# Altium PCB RF-UNIT.PcbDoc (part 2 of 4)
Units mm, origin at the board's own origin, x right, y up, seen from the top; angles counter-clockwise.
Board outline 187 x 77 mm, 2 copper layers (Top Layer, Top, Bottom Layer, Bottom); 244 components, 167 nets, 747 pads, 3684 vias.
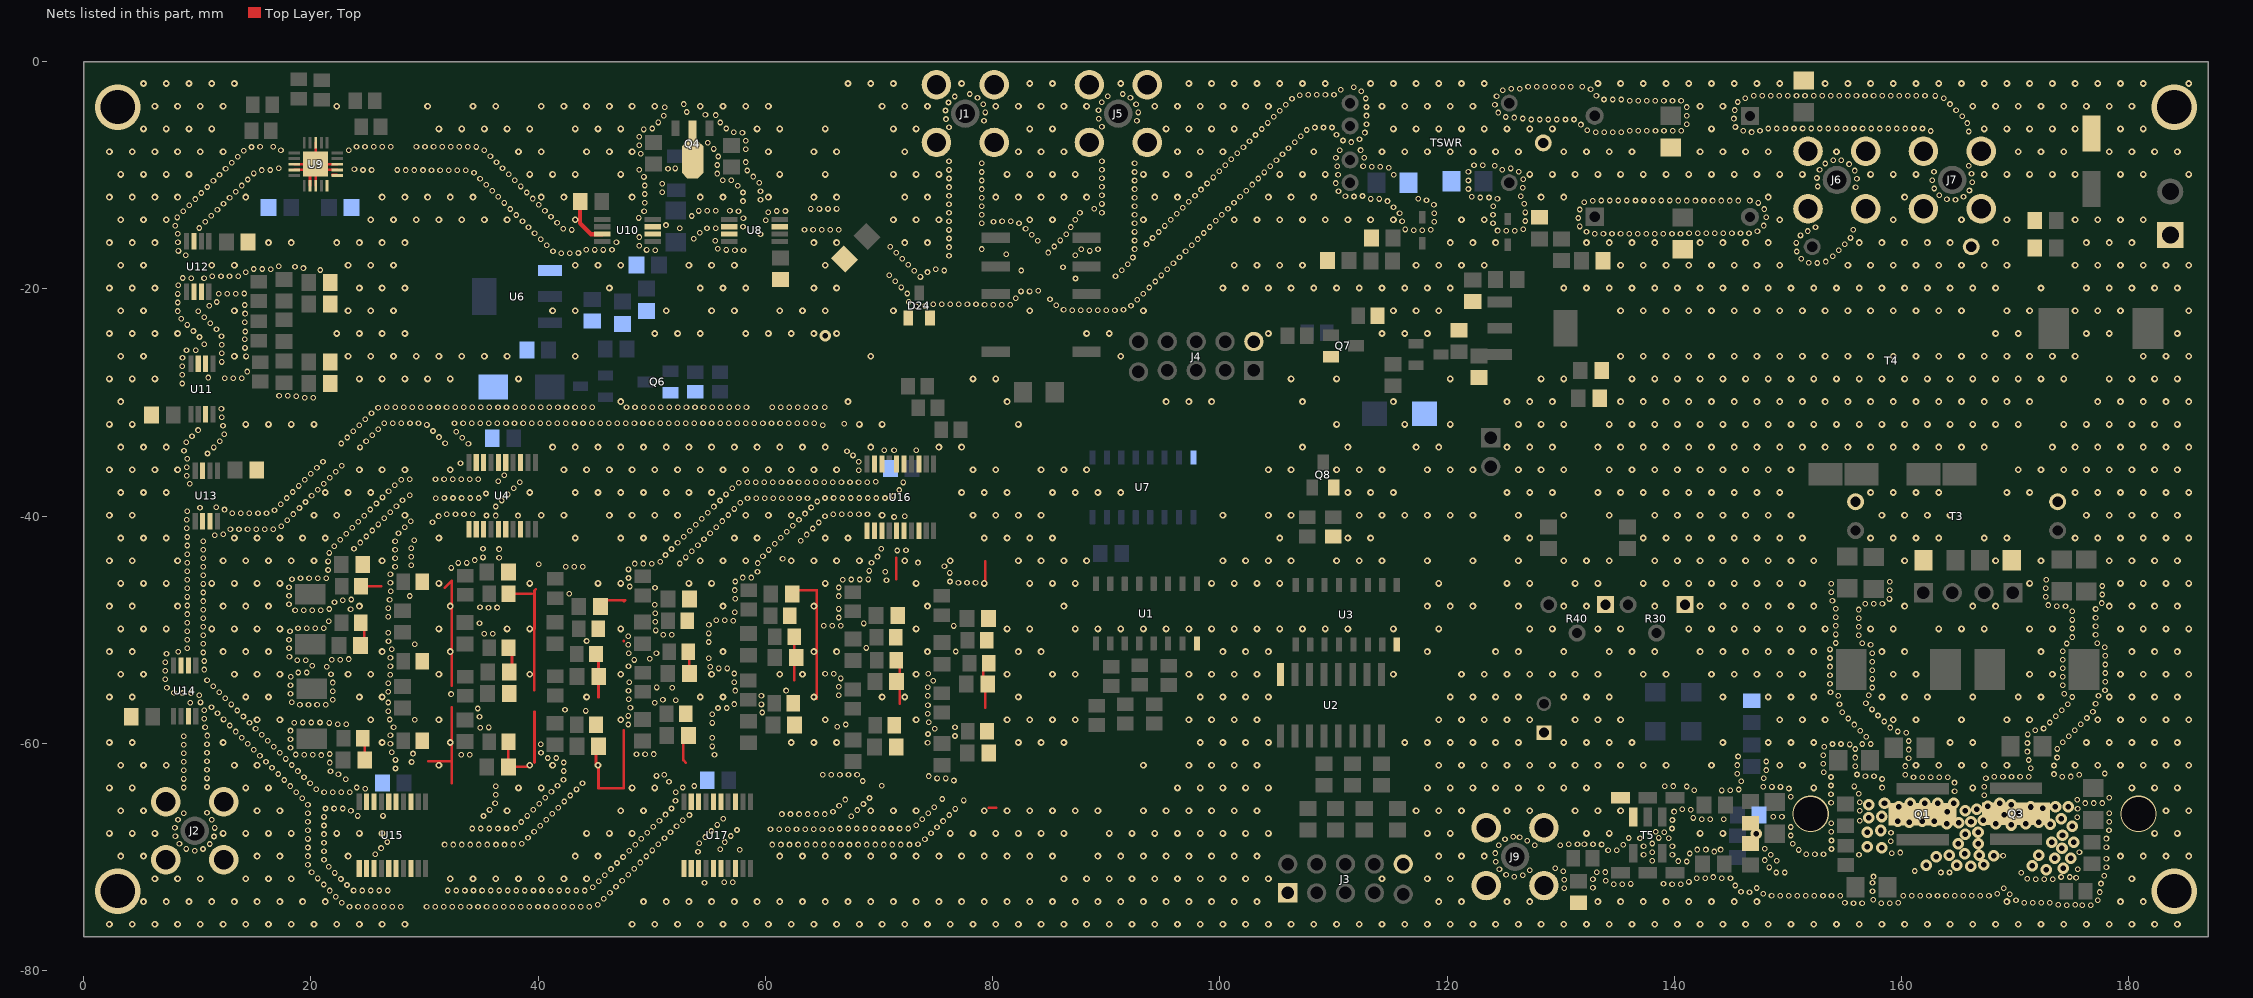
[diagram p2: the nets of this part, all layers, seen from the top]

## Via types
v1: diameter 0.5, hole 0.3, Top Layer, Top to Bottom Layer, Bottom, tented both sides, 1961 vias
v2: diameter 0.6, hole 0.3, Top Layer, Top to Bottom Layer, Bottom, tented both sides, 1584 vias
v3: diameter 1.016, hole 0.486, Top Layer, Top to Bottom Layer, Bottom, tented both sides, 127 vias
v4: diameter 0.8, hole 0.486, Top Layer, Top to Bottom Layer, Bottom, tented both sides, 6 vias
v5: diameter 4, hole 3, Top Layer, Top to Bottom Layer, Bottom, 4 vias
v6: diameter 3.2, hole 3, Top Layer, Top to Bottom Layer, Bottom, 2 vias

## Nets (pads, with @x,y where several pads share a name; then routed paths per layer and width w, separated by ;. In a path a pad name is that pad's centre, name@x,y a point inside that pad or via, vN(x,y) a via of type N, cw(c..) or ccw(c..) an arc to the next point about the centre after c; other vN are vias at no path point) (continued)
GND: C1.1 C2.1 C3.1 C4.1 C7.1 C13.1 C14.1 C15.1 C22.1 C23.1 C24.1 C34.1 C35.1 C36.1 C46.1 C47.1 C48.1 C55.1 C60.1 C61.1 C62.1 C74.1 C75.1 C76.1 C88.1 C89.1 C90.1 C95.2 C104.1 C105.2 C107.1 C108.1 C110.1 C113.2 C114.2 C115.1 C116.2 C117.1 C118.1 C119.2 C121.1 C122.1 C123.1 C124.1 C125.1 C126.1 C127.1 C128.2 C129.2 C130.1 C131.1 C132.1 C133.1 C134.1 C135.1 C136.1 C137.2 C139.1 C140.1 C141.1 C142.1 D2.2 D24.1 D24.2 J1.1 J1.2 J1.3 J1.4 J2.1 J2.2 J2.3 J2.4 J3.1 J3.10 J4.2 J5.1 J5.2 J5.3 J5.4 J6.1 J6.2 J6.3 J6.4 J7.1 J7.2 J7.3 J7.4 J8.1 J9.1 J9.2 J9.3 J9.4 L1.1 L2.1 L3.1 L4.1 L5.1 L6.1 L9.1 L10.1 L11.1 L14.1 L15.1 L16.1 L19.1 L20.1 L21.1 L24.1 L25.1 L26.1 L29.1 L30.1 L31.1 L34.1 L35.1 L36.1 Q1.2 Q3.2 Q4.0 Q4.2 Q6.2 Q7.2 Q8.2 R1.1 R14.1 R30.1 R33.1 R36.2 R40.1 R42.1 R43.2 R45.1 R53.2 R54.1 R55.2 R56.2 R70.1 T3.2 T3.3 T4.6 T5.3 T5.9 TSWR.7 U1.8 U2.8 U3.8 U4.3 U4.5 U4.6 U4.8 U4.9 U4.11 U4.12 U4.13 U4.15 U4.16 U4.18 U6.1 U7.8 U8.3 U8.6 U8.7 U9.3 U9.4 U9.7 U9.8 U9.10 U9.11 U9.12 U9.13 U9.18 U9.21 U10.3 U10.6 U10.7 U11.3 U11.6 U11.7 U12.3 U12.6 U12.7 U13.3 U13.6 U13.7 U14.3 U14.6 U14.7 U15.3 U15.5 U15.6 U15.8 U15.9 U15.11 U15.12 U15.13 U15.15 U15.16 U15.18 U16.3 U16.5 U16.6 U16.8 U16.9 U16.11 U16.12 U16.13 U16.15 U16.16 U16.18 U17.3 U17.5 U17.6 U17.8 U17.9 U17.11 U17.12 U17.13 U17.15 U17.16 U17.18 | length 113.6
  Top Layer, Top w0.23: U9.4@18.522,-9.529 19.922,-9.529 U9.7@19.922,-10.929 ; U9.3@18.522,-9.029 U9.21@20.422,-9.029 ; U9.8@20.422,-10.929 U9.21@20.422,-9.029 ; U9.18@20.422,-7.129 U9.21@20.422,-9.029 ; U9.21@20.922,-9.529 U9.12@22.322,-9.529 ; U9.11@21.902,-9.964 U9.11@22.257,-9.964 ; U9.13@22.322,-9.029 U9.21@20.422,-9.029 ; L35.1@24.397,-49.398 24.709,-49.711 C89.1@24.709,-51.303 ; L34.1@24.416,-46.173 26.208,-46.173 ; L36.1@24.575,-59.558 24.733,-59.717 C90.1@24.733,-61.463 ; 30.321,-61.59 32.39,-61.59 ; 31.796,-46.3 32.385,-45.71 32.385,-47.615 32.39,-47.62 32.39,-54.918 32.385,-54.923 ; 32.385,-56.823 32.39,-56.828 32.39,-61.59 ; 32.39,-63.495 32.39,-61.59 ; L6.1@37.387,-59.838 C15.1@37.387,-62.06 v2@39.297,-62.06 ; L5.1@37.387,-51.583 37.699,-51.895 C14.1@37.699,-53.488 ; L4.1@37.387,-46.82 37.392,-46.815 39.419,-46.815 ; 39.673,-57.229 39.678,-57.234 39.678,-61.679 ; 39.673,-55.329 39.673,-49.937 39.678,-49.932 39.678,-46.556 39.8,-46.434 ; C24.1@45.089,-60.125 45.089,-61.805 45.314,-62.03 45.314,-63.935 47.541,-63.935 47.541,-58.855 47.536,-58.85 ; L10.1@45.089,-52.136 45.309,-52.356 45.309,-55.946 ; C22.1@45.426,-47.311 45.509,-47.394 47.652,-47.394 47.541,-47.504 ; 47.536,-50.989 47.541,-50.984 ; C36.1@52.777,-59.802 52.777,-61.481 53.002,-61.707 ; C34.1@53.135,-46.784 C34.1@53.14,-46.779 ; L15.1@53.227,-51.945 53.315,-52.033 C35.1@53.315,-53.85 ; C46.1@62.081,-46.525 62.085,-46.52 64.528,-46.52 64.533,-46.525 64.533,-50.018 64.528,-50.023 v2@64.528,-56.05 ; 62.526,-54.422 62.526,-50.617 L20.1@62.531,-50.612 ; L25.1@71.516,-52.705 71.828,-53.017 71.828,-56.515 ; 71.516,-45.561 71.516,-43.656 ; L30.1@79.191,-53.032 79.191,-54.783 79.345,-54.937 79.345,-56.842 ; v2@79.35,-45.888 79.35,-43.983 ; 79.661,-65.659 80.335,-65.659
  Top Layer, Top w0.381: U9.21@19.922,-9.529 U9.21@20.422,-9.029 U9.21@20.922,-9.529 ; C135.1@43.7,-12.319 43.688,-12.331 43.688,-14.224 44.648,-15.184 U10.3@45.654,-15.184
  other v1: 23.397,-74.368 24.151,-74.368 24.905,-74.368 25.659,-74.368 26.413,-74.368 27.167,-74.368 27.921,-74.368 30.183,-74.368 30.937,-74.368 31.691,-74.368 32.445,-74.368 33.199,-74.368 33.953,-74.368 34.707,-74.368 35.461,-74.368 36.215,-74.368 36.969,-74.368 37.723,-74.368 38.477,-74.368 39.231,-74.368 39.985,-74.368 40.739,-74.368 41.493,-74.368 42.247,-74.368 43.001,-74.368 43.755,-74.368 44.509,-74.368 174.535,-74.235 175.892,-74.235 176.646,-74.235 45.247,-74.215 173.781,-74.215 175.288,-74.19 155.769,-74.058 156.523,-74.058 158.202,-74.058 158.956,-74.058 22.728,-74.021 155.015,-74.03 159.709,-74.027 170.791,-74.02 171.545,-74.02 172.299,-74.02 173.053,-74.02 177.276,-73.821 170.069,-73.803 157.502,-73.776 45.788,-73.688 22.195,-73.488 148.557,-73.409 149.311,-73.409 150.065,-73.409 150.819,-73.409 151.573,-73.409 152.327,-73.409 153.081,-73.409 153.835,-73.409 154.589,-73.409 160.147,-73.413 160.901,-73.412 161.655,-73.412 162.409,-73.412 163.163,-73.411 163.917,-73.411 164.671,-73.41 165.425,-73.41 166.179,-73.41 166.933,-73.409 167.687,-73.409 169.525,-73.281 147.822,-73.239 168.422,-73.242 46.321,-73.155 146.616,-73.113 177.446,-73.086 145.864,-73.06 157.439,-73.025 21.661,-72.955 23.756,-72.952 24.51,-72.952 25.264,-72.952 26.018,-72.952 26.772,-72.952 32.05,-72.952 32.804,-72.952 33.558,-72.952 34.312,-72.952 35.066,-72.952 35.82,-72.952 36.574,-72.952 37.328,-72.952 38.082,-72.952 38.836,-72.952 39.59,-72.952 40.344,-72.952 41.098,-72.952 41.852,-72.952 42.606,-72.952 43.36,-72.952 44.114,-72.952 130.308,-72.76 168.992,-72.748 147.266,-72.73 132.836,-72.711 44.81,-72.663 46.854,-72.622 145.352,-72.507 23.178,-72.468 21.128,-72.422 134.666,-72.386 135.42,-72.386 136.174,-72.37 139.801,-72.386 140.555,-72.386 139.048,-72.347 177.554,-72.34 157.439,-72.271 54.644,-72.261 56.376,-72.236 57.13,-72.226 141.284,-72.194 45.344,-72.13 47.387,-72.089 133.977,-72.081 130.308,-72.006 171.806,-71.973 172.56,-71.973 173.314,-71.973 22.644,-71.935 132.836,-71.957 171.054,-71.915 20.595,-71.889 141.969,-71.88 142.723,-71.876 144.185,-71.876 144.939,-71.876 175.355,-71.816 143.439,-71.769 174.037,-71.758 174.791,-71.758 125.921,-71.747 157.53,-71.724 177.835,-71.641 126.662,-71.605 45.877,-71.596 47.92,-71.556 125.191,-71.558 22.111,-71.402 170.521,-71.382 20.062,-71.355 148.962,-71.361 149.716,-71.361 163.463,-71.364 164.217,-71.363 133.175,-71.343 133.929,-71.329 130.234,-71.256 161.158,-71.235 127.284,-71.18 124.608,-71.081 175.501,-71.077 46.41,-71.063 48.453,-71.023 129.525,-71.001 148.351,-70.919 178.029,-70.912 21.578,-70.869 19.739,-70.674 46.943,-70.53 48.986,-70.489 124.269,-70.407 141.092,-70.399 140.339,-70.358 149.025,-70.336 138.044,-70.323 147.963,-70.272 21.155,-70.245 178.029,-70.158 47.476,-69.997 49.52,-69.956 19.739,-69.92 168.932,-69.885 148.494,-69.801 156.254,-69.816 137.292,-69.8 139.832,-69.8 25.657,-69.757 151.621,-69.748 152.375,-69.748 153.129,-69.748 141.356,-69.693 159.138,-69.676 124.248,-69.653 159.889,-69.609 175.653,-69.584 138.044,-69.569 54.07,-69.536 143.515,-69.521 21.155,-69.491 9.766,-69.458 48.009,-69.464 50.053,-69.423 134.167,-69.396 134.921,-69.396 150.963,-69.379 57.753,-69.36 142.027,-69.348 142.781,-69.348 144.068,-69.348 56.03,-69.328 10.504,-69.3 153.828,-69.3 9.031,-69.29 147.967,-69.262 26.179,-69.213 19.739,-69.166 178.029,-69.131 137.292,-69.046 139.832,-69.046 124.542,-68.959 127.71,-68.953 129.972,-68.953 48.542,-68.931 135.504,-68.918 31.766,-68.907 32.52,-68.907 33.274,-68.907 34.028,-68.907 34.782,-68.907 35.536,-68.907 36.29,-68.907 37.044,-68.907 37.798,-68.907 50.586,-68.89 60.618,-68.907 61.372,-68.907 62.126,-68.907 62.88,-68.907 63.634,-68.907 64.388,-68.907 65.142,-68.907 65.896,-68.907 66.65,-68.907 67.404,-68.907 68.158,-68.907 68.912,-68.907 69.666,-68.907 70.42,-68.907 71.174,-68.907 71.928,-68.907 72.682,-68.907 132.089,-68.888 133.596,-68.903 73.435,-68.886 130.721,-68.865 131.475,-68.865 132.843,-68.865 11.111,-68.853 150.43,-68.845 8.432,-68.833 38.547,-68.822 138.049,-68.815 54.187,-68.791 21.155,-68.737 56.424,-68.685 26.712,-68.68 159.038,-68.607 127.057,-68.577 153.828,-68.546 74.042,-68.438 125.097,-68.45 19.739,-68.412 49.076,-68.397 51.119,-68.357 136.975,-68.362 139.515,-68.362 178.029,-68.377 135.977,-68.331 39.109,-68.319 138.62,-68.323 54.706,-68.245 126.377,-68.25 125.816,-68.22 11.476,-68.193 8.077,-68.168 56.958,-68.152 150.258,-68.111 21.155,-67.983 74.575,-67.905 49.609,-67.864 159.065,-67.853 51.652,-67.824 139.115,-67.821 39.642,-67.786 138.362,-67.782 153.803,-67.792 55.239,-67.712 19.739,-67.658 178.257,-67.658 57.499,-67.628 60.452,-67.564 61.214,-67.564 61.976,-67.564 62.738,-67.564 63.5,-67.564 64.262,-67.564 65.024,-67.564 65.786,-67.564 34.201,-67.491 34.955,-67.491 35.709,-67.491 36.463,-67.491 37.217,-67.491 66.535,-67.491 67.289,-67.491 68.043,-67.491 68.797,-67.491 69.551,-67.491 70.305,-67.491 71.059,-67.491 71.813,-67.491 72.567,-67.491 139.795,-67.494 11.525,-67.441 37.97,-67.454 8.036,-67.415 75.108,-67.372 150.258,-67.357 50.142,-67.331 52.185,-67.291 40.175,-67.253 21.155,-67.229 73.267,-67.21 55.772,-67.178 153.803,-67.038 38.504,-66.921 19.739,-66.904 178.28,-66.905 75.641,-66.838 50.675,-66.798 156.331,-66.803 52.719,-66.757 11.267,-66.732 139.832,-66.741 8.308,-66.711 40.708,-66.719 73.8,-66.677 142.416,-66.669 143.17,-66.669 144.355,-66.669 56.305,-66.645 141.669,-66.564 175.452,-66.514 21.155,-66.475 148.714,-66.462 149.468,-66.462 67.566,-66.404 24.118,-66.385 26.349,-66.385 35.194,-66.391 39.037,-66.388 53.318,-66.3 76.174,-66.305 51.208,-66.265 61.459,-66.221 62.213,-66.221 62.967,-66.221 63.721,-66.221 64.475,-66.221 65.229,-66.221 41.241,-66.186 8.807,-66.146 19.739,-66.15 74.333,-66.144 178.28,-66.151 10.854,-66.101 65.954,-66.014 139.975,-66.001 23.524,-65.921 156.331,-65.928 68.099,-65.871 35.727,-65.858 39.57,-65.855 141.45,-65.843 76.707,-65.772 140.698,-65.786 175.488,-65.761 21.286,-65.732 22.04,-65.732 22.794,-65.732 51.741,-65.732 41.774,-65.653 74.866,-65.611 66.487,-65.48 19.739,-65.396 68.632,-65.338 40.103,-65.322 36.21,-65.279 176.166,-65.255 176.92,-65.255 177.674,-65.255 153.795,-65.219 156.331,-65.174 42.307,-65.12 52.089,-65.063 77.47,-65.024 175.468,-64.969 67.02,-64.947 75.565,-64.897 19.247,-64.825 69.166,-64.805 40.636,-64.788 178.27,-64.794 150.258,-64.703 42.841,-64.587 167.286,-64.572 36.268,-64.527 153.789,-64.465 156.243,-64.425 21.162,-64.316 21.916,-64.316 22.67,-64.316 23.424,-64.316 18.713,-64.292 52.107,-64.309 41.169,-64.255 164.665,-64.204 141.763,-64.137 144.16,-64.141 144.914,-64.138 145.664,-64.064 20.461,-64.037 43.374,-64.054 24.786,-63.996 150.084,-63.969 8.807,-63.884 158.282,-63.891 24.041,-63.883 52.729,-63.883 10.854,-63.839 148.588,-63.834 149.342,-63.834 147.834,-63.831 167.262,-63.818 141.09,-63.797 155.837,-63.79 18.18,-63.759 36.268,-63.773 139.162,-63.774 139.915,-63.758 53.735,-63.753 70.23,-63.737 41.703,-63.722 153.789,-63.711 19.928,-63.504 43.907,-63.52 164.657,-63.45 51.521,-63.373 145.877,-63.341 68.582,-63.312 76.597,-63.269 17.647,-63.226 42.236,-63.189 8.807,-63.13 23.055,-63.144 158.282,-63.137 10.854,-63.085 75.111,-63.086 75.865,-63.086 147.882,-63.079 167.425,-63.082 19.395,-62.971 161.052,-62.969 161.806,-62.969 162.56,-62.979 163.314,-62.979 164.068,-62.979 153.789,-62.957 168.165,-62.939 168.919,-62.939 169.673,-62.939 170.427,-62.929 171.181,-62.929 174.135,-62.925 174.889,-62.923 74.387,-62.876 156.819,-62.882 157.573,-62.882 50.419,-62.865 51.092,-62.754 65.054,-62.759 65.808,-62.759 66.562,-62.757 67.316,-62.759 68.07,-62.759 156.078,-62.74 160.33,-62.752 175.626,-62.763 22.426,-62.727 17.114,-62.692 173.416,-62.7 145.548,-62.662 177.876,-62.649 153.152,-62.554 18.862,-62.437 21.729,-62.441 42.25,-62.435 8.807,-62.376 148.076,-62.35 10.854,-62.331 27.445,-62.213 171.368,-62.199 16.581,-62.159 155.915,-62.004 160.33,-61.998 173.416,-61.946 18.329,-61.904 145.548,-61.908 153.115,-61.801 21.669,-61.689 42.25,-61.681 8.807,-61.622 16.048,-61.626 28.861,-61.642 10.854,-61.577 148.076,-61.596 27.445,-61.459 171.199,-61.464 17.796,-61.371 160.614,-61.3 40.852,-61.289 41.606,-61.289 155.915,-61.25 173.687,-61.242 145.61,-61.157 15.515,-61.093 153.115,-61.047 20.922,-61.032 19.415,-60.991 20.169,-60.991 33.234,-61.001 33.988,-61.001 55.526,-60.998 18.661,-60.98 48.657,-60.965 49.411,-60.965 50.164,-60.94 21.669,-60.935 28.99,-60.899 8.807,-60.868 17.262,-60.838 10.854,-60.823 40.251,-60.833 27.114,-60.781 171.078,-60.72 14.981,-60.56 160.62,-60.546 155.929,-60.496 173.706,-60.489 18.202,-60.381 16.729,-60.305 153.203,-60.298 55.327,-60.271 8.807,-60.114 40.24,-60.079 155.426,-60.093 10.854,-60.069 153.916,-60.054 154.67,-60.054 156.54,-60.054 157.294,-60.054 14.448,-60.027 27.002,-60.036 171.078,-59.966 74.276,-59.932 174.182,-59.904 16.196,-59.772 160.62,-59.792 18.202,-59.627 55.327,-59.517 13.915,-59.493 156.899,-59.412 174.715,-59.371 8.807,-59.36 76.688,-59.349 10.872,-59.315 27.002,-59.282 15.663,-59.238 171.105,-59.212 74.314,-59.179 160.41,-59.068 13.382,-58.96 159.664,-58.957 18.202,-58.873 156.366,-58.879 171.755,-58.832 175.248,-58.837 15.13,-58.705 74.902,-58.706 172.497,-58.693 34.911,-58.634 158.994,-58.611 10.685,-58.585 27.277,-58.58 35.664,-58.599 76.688,-58.595 66.339,-58.531 12.849,-58.427 155.833,-58.346 47.928,-58.341 67.068,-58.337 22.357,-58.32 23.111,-58.32 175.781,-58.304 18.538,-58.198 21.613,-58.202 55.327,-58.202 14.597,-58.172 19.291,-58.163 20.045,-58.163 20.799,-58.163 74.388,-58.155 173.03,-58.16 158.461,-58.078 29.141,-57.935 12.316,-57.894 26.952,-57.899 10.604,-57.835 155.3,-57.812 176.314,-57.771 34.841,-57.669 14.063,-57.639 173.563,-57.627 47.928,-57.587 157.928,-57.545 55.327,-57.448 74.301,-57.406 11.782,-57.361 59.735,-57.28 154.774,-57.272 176.839,-57.23 26.806,-57.159 44.185,-57.147 13.53,-57.106 10.604,-57.081 174.096,-57.094 42.367,-57.051 157.394,-57.012 34.694,-56.93 55.834,-56.89 56.588,-56.889 48.123,-56.858 11.249,-56.828 74.308,-56.652 12.997,-56.573 19.037,-56.591 19.791,-56.591 20.545,-56.591 21.299,-56.591 59.654,-56.573 154.539,-56.556 174.629,-56.561 57.257,-56.54 177.072,-56.513 156.861,-56.478 9.395,-56.43 50.272,-56.416 10.287,-56.397 26.806,-56.405 18.313,-56.381 52.1,-56.204 50.983,-56.165 21.914,-56.155 47.964,-56.122 12.464,-56.04 175.025,-55.919 59.654,-55.819 74.301,-55.819 154.432,-55.809 177.331,-55.805 10.183,-55.761 66.467,-55.772 157.113,-55.768 32.338,-55.661 18.202,-55.635 174.325,-55.639 8.699,-55.572 9.453,-55.572 7.946,-55.544 11.931,-55.506 153.744,-55.501 26.806,-55.45 21.93,-55.401 47.953,-55.368 57.359,-55.354 61.821,-55.355 177.907,-55.318 7.332,-55.106 51.803,-55.114 50.431,-55.078 157.426,-55.082 74.301,-55.065 66.467,-55.018 11.398,-54.973 174.185,-54.898 18.202,-54.881 153.698,-54.749 26.806,-54.696 21.93,-54.647 48.029,-54.617 57.257,-54.607 177.912,-54.564 74.777,-54.481 10.864,-54.44 7.172,-54.369 157.426,-54.328 66.637,-54.283 174.185,-54.144 18.232,-54.128 153.698,-53.995 26.982,-53.963 21.773,-53.909 57.259,-53.853 65.254,-53.869 66.008,-53.869 74.336,-53.869 177.912,-53.81 18.892,-53.763 19.646,-53.763 7.172,-53.615 157.426,-53.574 10.604,-53.504 55.899,-53.404 56.653,-53.404 174.185,-53.39 21.403,-53.253 55.16,-53.254 153.698,-53.241 47.953,-53.222 27.002,-53.209 20.126,-53.182 177.912,-53.056 7.176,-52.861 157.426,-52.82 10.604,-52.75 18.797,-52.695 19.551,-52.695 48.454,-52.658 21.829,-52.631 22.583,-52.631 174.185,-52.636 23.336,-52.58 49.831,-52.559 55.009,-52.515 153.698,-52.487 27.002,-52.455 18.114,-52.375 177.912,-52.302 7.289,-52.115 47.97,-52.08 50.414,-52.081 157.426,-52.066 10.528,-52 8.337,-51.947 76.756,-51.917 174.185,-51.882 153.698,-51.733 27.13,-51.712 9.112,-51.635 18.075,-51.622 68.879,-51.599 177.884,-51.549 47.928,-51.327 157.27,-51.328 29.141,-51.268 10.528,-51.246 174.528,-51.211 154.195,-51.166 156.53,-51.182 177.228,-51.177 55.027,-51.076 26.835,-51.018 44.263,-50.988 9.112,-50.881 18.075,-50.868 175.025,-50.643 47.93,-50.573 10.528,-50.492 156.243,-50.485 51.002,-50.436 51.756,-50.436 177.072,-50.439 154.195,-50.412 35.249,-50.344 36.003,-50.344 55.009,-50.323 26.806,-50.265 9.112,-50.127 18.158,-50.119 50.349,-50.06 175.025,-49.889 18.869,-49.867 19.623,-49.867 20.377,-49.867 21.131,-49.867 10.528,-49.738 156.243,-49.731 177.072,-49.685 76.58,-49.666 65.129,-49.641 65.883,-49.641 66.637,-49.658 154.195,-49.658 55.033,-49.569 34.841,-49.432 68.652,-49.446 9.112,-49.373 50.321,-49.306 21.583,-49.264 57.184,-49.208 55.677,-49.176 56.431,-49.176 175.025,-49.135 10.528,-48.984 156.243,-48.977 66.467,-48.924 177.072,-48.931 154.195,-48.904 26.806,-48.855 9.112,-48.619 50.321,-48.552 57.308,-48.465 175.025,-48.381 18.607,-48.295 19.361,-48.295 20.115,-48.295 20.869,-48.295 10.528,-48.23 156.243,-48.223 23.494,-48.199 21.613,-48.171 66.467,-48.17 177.072,-48.177 154.195,-48.15 26.806,-48.101 35.634,-48.059 36.388,-48.039 34.882,-48.014 173.669,-47.926 174.423,-47.926 9.112,-47.865 172.922,-47.828 50.256,-47.801 18.075,-47.76 156.806,-47.722 157.56,-47.722 158.314,-47.722 177.614,-47.653 22.08,-47.579 10.528,-47.476 153.915,-47.449 22.815,-47.411 26.927,-47.357 23.566,-47.337 158.931,-47.287 57.336,-47.26 9.112,-47.111 172.694,-47.109 28.708,-47.034 66.467,-47.037 18.075,-47.006 177.671,-46.901 42.743,-46.829 10.528,-46.722 153.805,-46.704 27.023,-46.609 158.947,-46.534 57.308,-46.507 9.112,-46.357 172.694,-46.355 50.287,-46.294 66.467,-46.283 18.075,-46.252 48.063,-46.191 177.671,-46.147 10.528,-45.968 153.805,-45.95 78.5,-45.874 27.002,-45.856 76.993,-45.873 77.746,-45.853 158.947,-45.78 57.341,-45.753 76.248,-45.754 70.66,-45.653 9.112,-45.603 66.804,-45.609 172.742,-45.603 67.557,-45.574 68.311,-45.574 69.065,-45.573 18.335,-45.545 21.347,-45.479 19.085,-45.467 19.839,-45.467 20.593,-45.467 47.953,-45.445 58.011,-45.407 58.765,-45.407 10.528,-45.214 27.002,-45.102 76.219,-45.001 59.308,-44.884 70.558,-44.906 9.112,-44.849 69.142,-44.823 21.511,-44.743 47.953,-44.691 32.353,-44.559 10.528,-44.46 27.408,-44.466 43.175,-44.456 43.929,-44.456 42.421,-44.444 75.758,-44.404 28.824,-44.337 40.06,-44.237 48.503,-44.175 49.257,-44.175 50.011,-44.194 52.466,-44.167 59.324,-44.13 32.965,-44.119 33.719,-44.119 9.112,-44.095 69.337,-44.094 73.437,-44.085 50.744,-44.018 21.511,-43.989 34.43,-43.867 61.512,-43.756 10.528,-43.706 27.408,-43.712 36.563,-43.652 35.147,-43.635 52.999,-43.634 28.824,-43.583 69.867,-43.558 59.786,-43.534 51.207,-43.423 9.112,-43.341 21.604,-43.24 53.532,-43.1 71.615,-43.025 72.375,-43.015 27.408,-42.958 60.291,-42.975 10.528,-42.952 35.147,-42.881 36.563,-42.898 51.74,-42.89 70.199,-42.881 23.799,-42.862 28.824,-42.829 22.061,-42.641 9.112,-42.587 54.065,-42.567 60.824,-42.441 52.273,-42.357 24.332,-42.329 10.528,-42.198 27.408,-42.204 63.112,-42.157 29.104,-42.129 22.572,-42.086 54.598,-42.034 61.357,-41.908 9.112,-41.833 52.806,-41.823 24.865,-41.796 11.55,-41.691 63.645,-41.624 12.296,-41.582 23.105,-41.553 27.714,-41.515 55.131,-41.501 61.891,-41.375 53.339,-41.29 25.398,-41.262 12.92,-41.16 13.674,-41.16 14.428,-41.16 15.182,-41.16 15.936,-41.16 16.69,-41.16 9.081,-41.08 64.178,-41.09 23.638,-41.02 28.248,-40.982 55.665,-40.968 17.393,-40.886 62.424,-40.842 53.872,-40.757 25.931,-40.729 64.711,-40.557 30.703,-40.529 24.171,-40.487 28.781,-40.449 56.198,-40.435 17.926,-40.353 9.081,-40.326 62.957,-40.309 54.406,-40.224 26.464,-40.196 71.329,-40.08 65.244,-40.024 31.237,-39.996 72.263,-40.005 24.704,-39.953 35.459,-39.948 36.277,-39.953 38.227,-39.953 56.731,-39.902 18.459,-39.819 31.971,-39.824 32.725,-39.824 33.479,-39.824 34.233,-39.824 65.971,-39.824 66.725,-39.824 67.479,-39.824 68.233,-39.824 68.987,-39.824 63.49,-39.776 13.08,-39.744 13.834,-39.744 14.588,-39.744 15.342,-39.744 16.096,-39.744 54.939,-39.691 26.998,-39.663 9.112,-39.573 16.801,-39.475 12.398,-39.423 25.237,-39.42 57.264,-39.368 18.992,-39.286 10.242,-39.252 64.023,-39.242 11.674,-39.213 36.268,-39.156 55.472,-39.158 27.531,-39.13 17.334,-38.942 25.77,-38.887 57.797,-38.835 19.525,-38.753 64.556,-38.709 36.801,-38.623 56.005,-38.624 28.064,-38.597 17.867,-38.409 31.001,-38.421 31.754,-38.408 32.508,-38.408 33.262,-38.408 34.016,-38.408 34.77,-38.408 58.431,-38.427 59.185,-38.427 59.939,-38.427 60.693,-38.427 61.447,-38.427 62.201,-38.427 62.955,-38.427 63.709,-38.427 65.247,-38.408 66.001,-38.408 66.755,-38.408 67.509,-38.408 68.263,-38.408 69.017,-38.408 69.771,-38.408 70.525,-38.408 26.304,-38.354 71.258,-38.23 20.059,-38.22 28.688,-38.173 37.334,-38.09 56.538,-38.091 35.411,-38.01 18.4,-37.875 26.837,-37.821 71.791,-37.697 20.592,-37.687 37.867,-37.556 57.071,-37.558 18.933,-37.342 27.37,-37.288 9.333,-37.158 21.125,-37.154 57.648,-37.073 38.388,-37.012 58.4,-37.011 59.154,-37.011 59.908,-37.011 60.662,-37.011 61.416,-37.011 62.17,-37.011 62.924,-37.011 63.678,-37.011 64.432,-37.011 65.186,-37.011 65.94,-37.011 66.694,-37.011 67.448,-37.011 68.202,-37.011 68.956,-37.011 72.149,-37.033 69.709,-36.985 36.477,-36.944 19.466,-36.809 27.953,-36.809 28.705,-36.757 30.967,-36.757 31.721,-36.757 32.475,-36.757 33.229,-36.757 33.983,-36.757 34.737,-36.757 21.658,-36.62 9.081,-36.447 37.01,-36.41 20,-36.276 22.191,-36.087 68.218,-35.969 20.533,-35.743 9.081,-35.693 22.724,-35.554 33.166,-35.338 21.066,-35.21 68.218,-35.215 9.112,-34.94 67.71,-34.658 10.904,-34.485 67.183,-34.29 8.836,-34.238 70.47,-34.214 71.329,-34.204 73.279,-34.204 11.438,-33.952 24.324,-33.955 22.665,-33.61 33.866,-33.627 31.811,-33.575 9.019,-33.507 11.971,-33.419 24.857,-33.421 23.199,-33.077 33.333,-33.094 31.278,-33.042 9.536,-32.958 25.39,-32.888 12.377,-32.784 23.732,-32.544 32.8,-32.56 30.745,-32.509 10.069,-32.425 25.923,-32.355 12.264,-32.038 24.265,-32.011 65.044,-31.992 30.212,-31.975 66.929,-31.874 26.458,-31.823 27.212,-31.823 27.966,-31.823 28.72,-31.823 29.474,-31.823 32.642,-31.823 33.396,-31.823 34.15,-31.823 34.904,-31.823 35.658,-31.823 36.412,-31.823 37.166,-31.823 37.92,-31.823 38.674,-31.823 39.428,-31.823 40.182,-31.823 40.936,-31.823 41.69,-31.823 42.444,-31.823 43.198,-31.823 43.952,-31.823 44.706,-31.823 45.46,-31.823 46.214,-31.823 46.968,-31.823 47.722,-31.823 48.476,-31.823 49.23,-31.823 49.984,-31.823 50.738,-31.823 51.492,-31.823 52.246,-31.823 53,-31.823 53.754,-31.823 54.508,-31.823 55.262,-31.823 56.016,-31.823 56.77,-31.823 57.524,-31.823 58.278,-31.823 59.032,-31.823 59.786,-31.823 60.54,-31.823 61.294,-31.823 62.048,-31.823 62.802,-31.823 63.556,-31.823 64.31,-31.823 24.798,-31.478 12.158,-31.292 25.331,-30.944 12.128,-30.538 25.912,-30.463 26.663,-30.407 27.417,-30.407 28.171,-30.407 28.925,-30.407 29.679,-30.407 30.433,-30.407 31.187,-30.407 31.941,-30.407 32.695,-30.407 33.449,-30.407 34.203,-30.407 34.957,-30.407 35.711,-30.407 36.465,-30.407 37.219,-30.407 37.973,-30.407 38.727,-30.407 39.481,-30.407 40.235,-30.407 40.989,-30.407 41.743,-30.407 42.497,-30.407 43.251,-30.407 44.005,-30.407 44.759,-30.407 47.775,-30.407 48.529,-30.407 49.283,-30.407 50.037,-30.407 50.791,-30.407 51.545,-30.407 52.299,-30.407 53.053,-30.407 53.807,-30.407 54.561,-30.407 55.315,-30.407 56.069,-30.407 56.823,-30.407 57.577,-30.407 58.331,-30.407 60.593,-30.407 61.347,-30.407 62.101,-30.407 62.855,-30.407 63.609,-30.407 64.363,-30.407 65.218,-30.417 19.45,-29.585 20.204,-29.585 18.706,-29.462 17.2,-29.419 17.954,-29.419 8.68,-28.325 12.418,-27.871 13.172,-27.871 13.926,-27.871 10.973,-27.805 8.67,-27.571 14.388,-27.276 8.67,-26.817 12.158,-26.428 8.7,-26.063 14.294,-25.944 12.158,-25.674 9.861,-25.404 9.053,-25.397 14.199,-25.196 12.158,-24.92 10.62,-24.862 14.192,-24.442 10.197,-24.238 12.133,-24.167 14.224,-23.749 9.664,-23.705 11.69,-23.557 9.131,-23.172 11.157,-23.023 14.192,-22.927 8.598,-22.639 10.623,-22.49 14.209,-22.173 8.289,-21.951 10.09,-21.957 86.995,-21.881 87.749,-21.881 88.503,-21.884 89.257,-21.884 90.011,-21.884 90.765,-21.884 86.244,-21.824 91.518,-21.839 73.274,-21.527 11.044,-21.498 74.028,-21.513 92.18,-21.478 85.587,-21.452 14.192,-21.419 79.29,-21.408 80.044,-21.408 80.798,-21.408 81.552,-21.4 74.767,-21.366 75.521,-21.366 76.275,-21.366 77.029,-21.366 77.783,-21.366 78.537,-21.366 8.289,-21.197 11.714,-21.151 72.621,-21.15 92.717,-20.948 85.054,-20.919 82.029,-20.816 8.289,-20.443 11.887,-20.418 12.641,-20.418 13.395,-20.418 14.149,-20.408 72.497,-20.406 93.25,-20.415 82.498,-20.226 83.252,-20.226 84.003,-20.163 71.964,-19.873 93.783,-19.882 8.319,-19.689 71.431,-19.34 94.316,-19.349 87.295,-19.089 9.48,-19.059 10.598,-19.057 8.71,-19.045 73.646,-18.948 11.331,-18.88 12.085,-18.88 12.839,-18.88 13.593,-18.88 90.819,-18.894 70.898,-18.806 94.849,-18.816 14.26,-18.527 74.268,-18.521 73.113,-18.415 75.73,-18.382 82.516,-18.382 91.352,-18.361 20.832,-18.338 74.983,-18.282 95.382,-18.282 14.962,-18.254 15.716,-18.254 16.47,-18.26 19.344,-18.167 86.199,-18.102 18.6,-18.045 17.18,-18.006 72.58,-17.882 91.885,-17.827 95.916,-17.749 152.589,-17.726 151.835,-17.691 153.331,-17.594 72.047,-17.348 151.164,-17.348 92.352,-17.235 96.449,-17.216 153.931,-17.138 76.16,-17.072 8.992,-17.048 87.265,-17.035 81.202,-16.948 42.039,-16.858 42.793,-16.858 43.547,-16.845 71.514,-16.815 84.89,-16.804 150.762,-16.71 41.307,-16.678 96.982,-16.683 8.344,-16.661 88.535,-16.661 50.297,-16.603 57.322,-16.603 58.076,-16.603 154.464,-16.605 44.991,-16.573 45.745,-16.573 49.544,-16.573 56.569,-16.573 44.238,-16.542 46.499,-16.549 89.276,-16.52 79.034,-16.495 87.798,-16.502 92.496,-16.495 55.821,-16.476 76.16,-16.318 70.981,-16.282 85.423,-16.271 48.892,-16.194 40.753,-16.166 97.515,-16.15 93.544,-16.057 154.998,-16.071 150.739,-15.956 8.299,-15.908 46.893,-15.906 55.591,-15.758 83.968,-15.769 85.956,-15.737 92.496,-15.741 40.22,-15.633 98.048,-15.617 53.696,-15.59 76.16,-15.564 94.077,-15.524 155.506,-15.514 48.899,-15.44 151.103,-15.296 83.434,-15.235 86.489,-15.204 59.57,-15.182 8.289,-15.155 133.005,-15.147 133.759,-15.147 134.513,-15.147 135.267,-15.147 136.021,-15.147 136.775,-15.147 137.529,-15.147 138.283,-15.147 139.037,-15.147 139.791,-15.147 140.545,-15.147 39.687,-15.1 141.297,-15.099 142.051,-15.1 142.805,-15.1 143.559,-15.1 144.313,-15.101 145.067,-15.101 145.821,-15.102 146.575,-15.102 98.581,-15.084 54.229,-15.057 94.611,-14.991 92.496,-14.987 132.271,-14.973 147.311,-14.94 151.751,-14.912 125.195,-14.891 125.949,-14.891 124.441,-14.869 117.054,-14.839 117.808,-14.839 42.947,-14.81 63.445,-14.806 64.199,-14.806 64.953,-14.806 65.707,-14.806 66.461,-14.806 76.16,-14.81 118.56,-14.792 155.737,-14.797 116.303,-14.766 126.691,-14.757 42.199,-14.717 82.901,-14.702 10.178,-14.638 52.461,-14.651 54.866,-14.653 55.62,-14.653 39.154,-14.567 86.877,-14.558 152.427,-14.578 58.032,-14.534 99.115,-14.55 131.682,-14.502 95.144,-14.457 8.05,-14.439 147.866,-14.429 51.251,-14.385 79.034,-14.233 92.496,-14.233 124.039,-14.232 82.321,-14.221 41.666,-14.183 10.711,-14.105 118.866,-14.103 80.077,-14.078 76.16,-14.056 80.831,-14.057 81.585,-14.057 116.038,-14.06 38.621,-14.033 126.866,-14.024 99.648,-14.017 60.041,-13.968 95.677,-13.924 87.279,-13.92 58.069,-13.776 48.865,-13.755 131.556,-13.758 8.24,-13.71 148.085,-13.707 41.133,-13.65 11.244,-13.572 53.527,-13.585 38.088,-13.5 79.034,-13.479 92.496,-13.479 100.181,-13.484 124.039,-13.478 96.21,-13.391 115.817,-13.339 118.866,-13.349 76.16,-13.302 89.62,-13.3 87.687,-13.286 126.866,-13.27 60.263,-13.248 8.758,-13.162 57.633,-13.161 49.324,-13.156 54.136,-13.141 61.01,-13.145 61.764,-13.145 40.6,-13.117 54.89,-13.115 55.644,-13.115 56.88,-13.125 11.777,-13.039 131.674,-13.014 37.554,-12.967 64.004,-12.962 64.758,-12.962 65.512,-12.962 66.266,-12.962 147.906,-12.975 88.952,-12.95 100.714,-12.951 96.743,-12.858 115.284,-12.806 79.034,-12.725 92.496,-12.725 124.049,-12.724 9.291,-12.629 40.067,-12.584 118.84,-12.595 76.16,-12.548 89.622,-12.524 12.31,-12.506 126.787,-12.52 37.021,-12.434 147.38,-12.435 49.396,-12.406 101.247,-12.418 132.065,-12.369 97.276,-12.325 58.032,-12.272 114.751,-12.272 132.808,-12.241 133.562,-12.222 134.316,-12.223 135.07,-12.223 135.824,-12.223 136.578,-12.224 137.332,-12.224 138.086,-12.224 138.84,-12.225 139.594,-12.225 140.348,-12.225 141.102,-12.226 141.856,-12.226 142.61,-12.227 143.364,-12.227 144.118,-12.227 144.872,-12.228 145.626,-12.228 146.655,-12.228 118.191,-12.212 59.57,-12.166 164.744,-12.156 9.824,-12.096 163.992,-12.116 113.268,-12.082 114.022,-12.082 117.449,-12.075 124.429,-12.072 39.534,-12.051 12.843,-11.972 79.034,-11.971 92.496,-11.971 122.93,-11.955 123.684,-11.955 36.488,-11.901 122.178,-11.903 101.78,-11.885 111.804,-11.869 165.447,-11.883 111.051,-11.849 112.557,-11.829 126.476,-11.833 76.16,-11.794 97.809,-11.792 89.622,-11.77 163.326,-11.763 49.396,-11.652 10.358,-11.563 39,-11.518 58.032,-11.518 50.934,-11.492 13.376,-11.439 59.57,-11.412 110.445,-11.399 35.955,-11.368 102.313,-11.351 165.972,-11.342 98.343,-11.258 79.034,-11.217 92.496,-11.217 121.879,-11.211 162.867,-11.165 126.649,-11.099 155.948,-11.056 10.891,-11.03 76.16,-11.04 89.622,-11.016 38.467,-10.985 152.633,-10.988 13.91,-10.906 57.576,-10.918 49.396,-10.898 35.422,-10.835 102.847,-10.818 50.934,-10.738 98.876,-10.725 110.202,-10.685 59.459,-10.666 166.216,-10.628 11.424,-10.496 37.934,-10.451 56.991,-10.442 79.034,-10.463 92.496,-10.463 121.879,-10.457 56.237,-10.435 162.698,-10.43 14.443,-10.373 126.691,-10.346 34.889,-10.301 156.071,-10.312 76.16,-10.286 103.38,-10.285 89.622,-10.262 152.549,-10.238 99.409,-10.192 49.313,-10.148 58.946,-10.114 11.957,-9.963 110.405,-9.959 115.316,-9.943 37.401,-9.918 166.152,-9.877 14.976,-9.84 55.759,-9.852 34.356,-9.768 103.913,-9.752 79.034,-9.709 92.496,-9.709 121.879,-9.703 126.302,-9.701 162.855,-9.692 99.942,-9.659 58.413,-9.581 155.87,-9.585 15.669,-9.543 16.423,-9.535 24.586,-9.534 25.34,-9.535 27.602,-9.539 28.356,-9.541 29.11,-9.542 29.864,-9.544 30.618,-9.545 31.372,-9.547 32.126,-9.548 32.88,-9.549 33.633,-9.551 76.16,-9.532 48.901,-9.517 89.622,-9.508 124.865,-9.502 152.781,-9.521 23.833,-9.484 12.49,-9.43 51.43,-9.435 17.161,-9.379 36.868,-9.385 52.07,-9.398 125.612,-9.397 114.86,-9.343 113.357,-9.254 114.111,-9.254 104.446,-9.219 110.328,-9.209 112.604,-9.208 124.19,-9.166 165.902,-9.166 100.475,-9.126 122.371,-9.132 123.125,-9.127 55.759,-9.098 155.378,-9.014 79.034,-8.955 92.496,-8.955 153.293,-8.967 13.023,-8.897 36.335,-8.852 58.287,-8.838 76.16,-8.778 89.622,-8.754 104.979,-8.686 153.989,-8.677 154.698,-8.687 101.008,-8.593 110.216,-8.463 112.716,-8.462 13.557,-8.364 55.853,-8.349 35.801,-8.319 105.512,-8.152 49.044,-8.107 101.542,-8.06 14.09,-7.831 17.364,-7.802 23.326,-7.81 35.264,-7.789 110.546,-7.785 112.385,-7.784 58.287,-7.706 55.451,-7.681 106.046,-7.619 102.075,-7.526 14.775,-7.515 15.528,-7.498 24.013,-7.499 29.291,-7.495 30.045,-7.497 30.799,-7.498 31.553,-7.5 32.307,-7.501 33.061,-7.502 33.815,-7.504 34.566,-7.505 16.675,-7.495 24.767,-7.487 25.521,-7.488 26.275,-7.489 27.029,-7.491 48.901,-7.367 54.918,-7.148 106.579,-7.086 111.577,-7.079 102.608,-6.993 58.287,-6.952 110.837,-6.939 112.287,-6.824 48.901,-6.613 107.112,-6.553 103.141,-6.46 110.27,-6.441 57.983,-6.262 112.768,-6.244 57.23,-6.214 133.072,-6.205 133.826,-6.205 134.58,-6.205 135.334,-6.205 146.797,-6.198 165.902,-6.15 162.565,-6.101 136.077,-6.078 136.831,-6.078 137.585,-6.078 138.339,-6.078 139.093,-6.078 146.051,-6.089 139.847,-6.071 140.601,-6.068 147.541,-6.072 132.335,-6.045 107.645,-6.02 49.289,-5.966 103.674,-5.927 50.038,-5.884 56.552,-5.886 148.271,-5.885 149.025,-5.885 149.779,-5.885 150.533,-5.885 151.287,-5.885 152.041,-5.885 152.795,-5.885 153.549,-5.885 154.303,-5.885 155.057,-5.885 155.811,-5.885 156.565,-5.885 157.319,-5.885 158.073,-5.885 158.827,-5.885 159.581,-5.885 160.335,-5.885 161.089,-5.885 161.843,-5.885 108.366,-5.799 109.12,-5.799 109.874,-5.799 76.16,-5.762 145.376,-5.754 89.622,-5.738 131.778,-5.538 112.903,-5.502 141.103,-5.506 104.207,-5.394 165.778,-5.406 50.571,-5.351 56.016,-5.356 79.24,-5.214 92.702,-5.214 127.402,-5.09 128.156,-5.09 128.91,-5.09 129.664,-5.09 130.418,-5.09 131.172,-5.09 75.897,-5.055 89.354,-5.033 145.244,-5.012 126.653,-5.001 125.903,-4.923 104.741,-4.861 125.15,-4.875 165.329,-4.801 51.049,-4.768 112.903,-4.748 141.103,-4.752 55.641,-4.702 54.724,-4.667 124.508,-4.48 79.363,-4.47 92.825,-4.47 53.094,-4.432 105.274,-4.327 75.853,-4.303 89.318,-4.28 145.32,-4.261 164.796,-4.268 51.14,-4.019 112.903,-3.994 141.103,-3.998 105.807,-3.794 124.209,-3.788 79.162,-3.743 92.624,-3.743 52.806,-3.736 164.262,-3.735 76.121,-3.598 89.597,-3.58 145.578,-3.553 136.067,-3.436 136.821,-3.436 137.575,-3.436 138.329,-3.436 139.083,-3.436 139.837,-3.443 140.591,-3.444 133.813,-3.332 134.567,-3.332 135.321,-3.33 106.348,-3.269 112.837,-3.243 163.7,-3.232 146.254,-3.218 78.67,-3.172 92.132,-3.172 76.659,-3.07 90.143,-3.059 124.356,-3.048 146.979,-3.012 147.733,-3.011 148.487,-3.011 149.241,-3.011 149.995,-3.011 150.749,-3.011 151.503,-3.011 152.257,-3.011 153.011,-3.011 153.765,-3.011 154.519,-3.011 155.273,-3.011 156.027,-3.011 156.781,-3.011 157.535,-3.011 158.289,-3.011 159.043,-3.011 159.797,-3.011 160.551,-3.011 161.305,-3.011 162.059,-3.011 162.977,-3.018 133.142,-2.989 107.032,-2.953 107.786,-2.926 108.54,-2.926 109.294,-2.926 110.048,-2.926 77.99,-2.845 91.452,-2.845 112.44,-2.602 124.895,-2.521 110.653,-2.476 132.628,-2.437 125.636,-2.382 126.39,-2.382 111.772,-2.252 127.126,-2.217 127.88,-2.216 128.634,-2.216 129.388,-2.216 130.142,-2.216 130.896,-2.216 131.905,-2.223